# EAGLE board Color sensor (EAGLE 9.6.2)
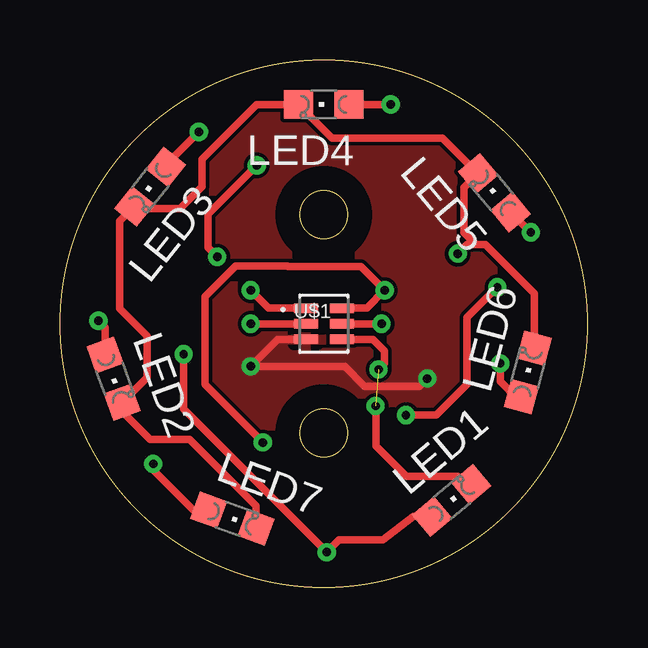
[diagram p0: board, top side]
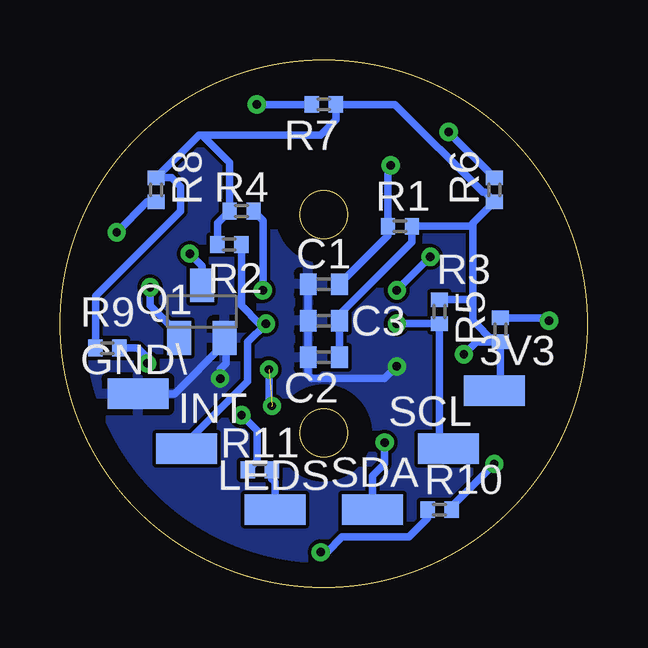
[diagram p1: board, bottom side, seen from below]

Size 22 x 22 mm. Coordinates in mm from the lower left corner, seen from the top.
Outline: circle at 11,11 radius 11
Outline: circle at 11,15.56 radius 1
Outline: circle at 11,6.44 radius 1
Copper layers (1*16): Top 0.035mm / dielectric 1.5mm / Bottom 0.035mm
Design rules "default": minimum track width 6mil, minimum drill 0.35mm, track to track 6mil, track to pad 6mil, pad to pad 6mil, via to via 6mil, smd to smd 6mil, copper to edge 40mil, drill to drill 6mil, minimum pad ring 10mil, minimum via ring 8mil, stop-mask expansion 4mil, vias tented up to drill 0mil, thermal gap 10mil

## Footprints (pad centres in the part's own frame; a part is rotated, then mirrored left to right if it is on the bottom)
SMD1,27-2,54 = smd 1.27 x 2.54: 1 0,0
C0402 = smd 0.7 x 0.9: 1 -0.65,0; 2 0.65,0
CHIPLED_0805 = smd 1.2 x 1.2: A 0,-1.05; C 0,1.05
SOT23-BEC = smd 1 x 1.4: B -0.95,-1.1; C 0,1.1; E 0.95,-1.1
R0402 = smd 0.6 x 0.7: 1 -0.5,0; 2 0.5,0
SON65P200X240X70-6N = smd 1 x 0.4: 1 -0.75,0.65; 2 -0.75,0; 3 -0.75,-0.65; 4 0.75,-0.65; 5 0.75,0; 6 0.75,0.65

## Placement (x,y rotation side)
3V3  [SMD1,27-2,54]  3.89,8.21 270 bottom
C1  1uf  [C0402]  11,12.65 180 bottom
C2  22uf  [C0402]  11,9.6 180 bottom
C3  1uf  [C0402]  11,11.13 180 bottom
GND\  [SMD1,27-2,54]  18.75,8.08 270 bottom
INT  [SMD1,27-2,54]  16.71,5.79 270 bottom
LED1  IR  [CHIPLED_0805]  16.33,3.63 310 top
LED2  RED  [CHIPLED_0805]  2.24,8.71 200 top
LED3  Blue  [CHIPLED_0805]  3.76,16.71 141.4 top
LED4  Green  [CHIPLED_0805]  11,20.14 90 top
LED5  RED  [CHIPLED_0805]  18.11,16.46 40 top
LED6  Blue  [CHIPLED_0805]  19.51,8.97 345 top
LED7  Green  [CHIPLED_0805]  7.19,2.87 250 top
LEDS  [SMD1,27-2,54]  13.03,3.25 270 bottom
Q1  BCV72SMD  [SOT23-BEC]  16.08,11.51 0 bottom
R1  22  [R0402]  7.83,15.06 180 bottom
R2  10k  [R0402]  14.94,14.3 180 bottom
R3  1.5k  [R0402]  6.17,11.51 90 bottom
R4  1.5k  [R0402]  14.43,15.7 180 bottom
R5  75  [R0402]  3.63,10.75 90 bottom
R6  75  [R0402]  3.89,16.59 90 bottom
R7  12  [R0402]  11,20.14 180 bottom
R8  12  [R0402]  17.98,16.59 270 bottom
R9  12  [R0402]  20.02,9.98 0 bottom
R10  12  [R0402]  6.17,3.25 0 bottom
R11  75  [R0402]  13.67,4.9 180 bottom
SCL  [SMD1,27-2,54]  5.79,5.79 270 bottom
SDA  [SMD1,27-2,54]  8.97,3.25 270 bottom
U$1  TCS37717FN  [SON65P200X240X70-6N]  11,11 0 top

## Library data of the parts
3V3 GND\ INT LEDS SCL SDA = wirepad
C1-C3 = rcl; SPICEPREFIX: C
LED1-LED7 = led
Q1 = transistor-npn
R1-R11 = rcl; SPICEPREFIX: R
U$1 = TCS37717FN

## Nets
GND: C1.2 C2.2 C3.2 GND\.1 Q1.E U$1.3
INT: INT.1 R2.1 U$1.5
LDR: LED1.C U$1.4
N$1: C1.1 R1.2 U$1.1
N$2: Q1.B R11.2
N$3: LED2.C LED3.C LED4.C LED5.C LED6.C LED7.C Q1.C
N$4: LEDS.1 R11.1
N$6: LED2.A R5.2
N$7: LED3.A R6.2
N$8: LED4.A R7.2
N$9: LED5.A R8.2
N$10: LED6.A R9.2
N$11: LED7.A R10.2
SCL: R3.1 SCL.1 U$1.2
SDA: R4.1 SDA.1 U$1.6
VCC: 3V3.1 C2.1 C3.1 LED1.A R1.1 R2.2 R3.2 R4.2 R5.1 R6.1 R7.1 R8.1 R9.1 R10.1

## Tracks (layer width: path | path; a pad name or v marks a point on that pad's centre or on a via)
GND  (via drill 0.35)
  Top 0.305: U$1.3 9.08,10.35 v7.95,9.22 11.88,9.22 12.71,8.39 14.99,8.39 v15.32,8.71
  Bottom 0.305: GND\.1 17.22,8.08 15.13,10.17 Q1.E 15.06,10.34 15.06,9.35 15.32,9.1 v15.32,8.71 | C1.2 C3.2 C2.2 11.65,8.86 11.51,8.71 8.46,8.71 v7.95,9.22
  pour Top: -2.46,22.18 -2.46,-1.06 25.35,-1.06 25.35,22.3 -2.46,22.3
  pour Bottom: -2.72,22.43 -2.72,-0.94 25.1,-0.94 25.1,22.43
INT  (via drill 0.35)
  Top 0.305: U$1.5 v13.41,11
  Bottom 0.305: INT.1 16.71,6.05 14.18,8.59 14.18,10.24 v13.41,11 13.67,11 14.44,11.77 R2.1
LDR  (via drill 0.35)  (2 unrouted)
  Top 0.305: U$1.4 13.05,10.35 13.54,9.86 13.54,9.35 v13.29,9.1 | LED1.C 16.6,4.63 14.45,4.63 13.17,5.91 v13.17,7.57
  Bottom 0.305: v13.29,9.1 13.29,7.7 13.17,7.58 v13.17,7.57 13.29,7.69 v13.29,9.1
N$1  (via drill 0.35)
  Top 0.305: U$1.1 8.7,11.65 v7.95,12.4 | v8.21,17.6 6.17,15.57 6.17,14.18 v6.55,13.79
  Bottom 0.305: C1.1 8.32,14.68 R1.2 8.32,17.48 v8.21,17.6 | v6.55,13.79 v7.95,12.4
N$2  (via drill 0.35)
  Top 0.305: v14.43,7.19 15.7,7.19 16.97,8.46 16.97,11.25 v18.24,12.52
  Bottom 0.305: Q1.B 17.03,10.55 18.24,11.76 v18.24,12.52 | v14.43,7.19 13.79,6.55 13.79,5.29 R11.2
N$3  (via drill 0.35)
  Top 0.305: LED3.C 3.02,15.81 | 3.02,15.81 2.49,15.28 2.49,11.63 3.63,10.49 3.63,8.77 LED2.C 2.6,7.34 3.76,6.17 5.41,6.17 8.18,3.41 LED7.C | 3.02,15.81 5.01,15.81 5.92,16.71 5.92,17.86 8.21,20.14 LED4.C 11.35,18.75 15.96,18.75 LED5.C 16.84,16.67 16.84,14.81 17.35,14.3 | LED6.C 19.78,12.25 17.73,14.3 17.35,14.3 | v16.59,13.92 16.97,14.3 17.35,14.3
  Bottom 0.305: Q1.C 16.08,13.41 v16.59,13.92
N$4
  Bottom 0.305: R11.1 13.17,4.53 13.03,4.4 LEDS.1
N$6  (via drill 0.35)
  Top 0.305: LED2.A 1.88,10.85 v1.6,11.13
  Bottom 0.305: R5.2 1.72,11.25 v1.6,11.13
N$7  (via drill 0.35)
  Top 0.305: LED3.A 4.42,17.62 v5.79,19
  Bottom 0.305: v5.79,19 v5.79,18.99 R6.2
N$8  (via drill 0.35)
  Top 0.305: v13.79,20.14 LED4.A
  Bottom 0.305: R7.2 v13.79,20.14
N$9  (via drill 0.35)
  Top 0.305: v19.64,14.81 v19.63,14.81 LED5.A
  Bottom 0.305: R8.2 18.36,16.09 v19.64,14.81
N$10  (via drill 0.35)
  Top 0.305: v18.37,9.35 18.37,8.59 18.42,8.53 19,7.95 LED6.A
  Bottom 0.305: v18.37,9.35 18.37,9.6 18.75,9.98 R9.2
N$11  (via drill 0.35)
  Top 0.305: LED7.A 5.56,3.23 3.89,4.9 v3.89,5.16
  Bottom 0.305: v3.89,5.16 5.67,3.37 R10.2
SCL  (via drill 0.35)
  Top 0.305: U$1.2 v7.95,11
  Bottom 0.305: v7.95,11 v7.94,11.01 R3.1 6.17,6.17 SCL.1
SDA  (via drill 0.35)
  Top 0.305: U$1.6 12.79,11.65 v13.54,12.4 12.55,13.39 9.52,13.39 9.49,13.41 7.32,13.41 6.05,12.14 6.05,8.46 v8.46,6.05
  Bottom 0.305: R4.1 13.54,15.31 v13.54,12.4 | SDA.1 8.97,4.65 8.46,5.16 v8.46,6.05
VCC  (via drill 0.35)
  Top 0.305: LED1.A 14.74,2.96 13.46,1.98 11.63,1.98 v11.13,1.47 5.16,7.44 v5.16,9.73
  Bottom 0.305: R5.1 3.63,8.46 3V3.1 | R9.1 20.52,12.15 16.97,15.7 16.97,16.71 17.34,17.09 R8.1 16.2,18.87 16.08,18.87 | v11.13,1.47 10.87,1.47 10.24,2.11 7.44,2.11 6.67,2.88 R10.1 | R2.2 15.44,15.19 R4.2 14.93,17.72 16.08,18.87 | 16.08,18.87 11.13,18.87 10.49,19.51 R7.1 8.03,20.14 4.36,16.48 4.28,16.48 R6.1 4.78,15.2 4.78,15.06 | 4.78,15.06 4.78,11.89 | 4.78,11.89 4.78,11.13 3.9,10.25 R5.1 | C2.1 C3.1 10.35,11.38 7.33,14.41 R1.1 4.78,15.06 | R3.2 4.9,12.01 4.78,11.89 | R5.1 4.64,10.25 v5.16,9.73